# Altium PCB LED_v2.pcbdoc
Units mm, origin at the board's own origin, x right, y up, seen from the top; angles counter-clockwise.
Board outline 105.66 x 67.56 mm, 2 copper layers (Top Layer, Bottom Layer); 28 components, 90 nets, 280 pads, 65 vias.
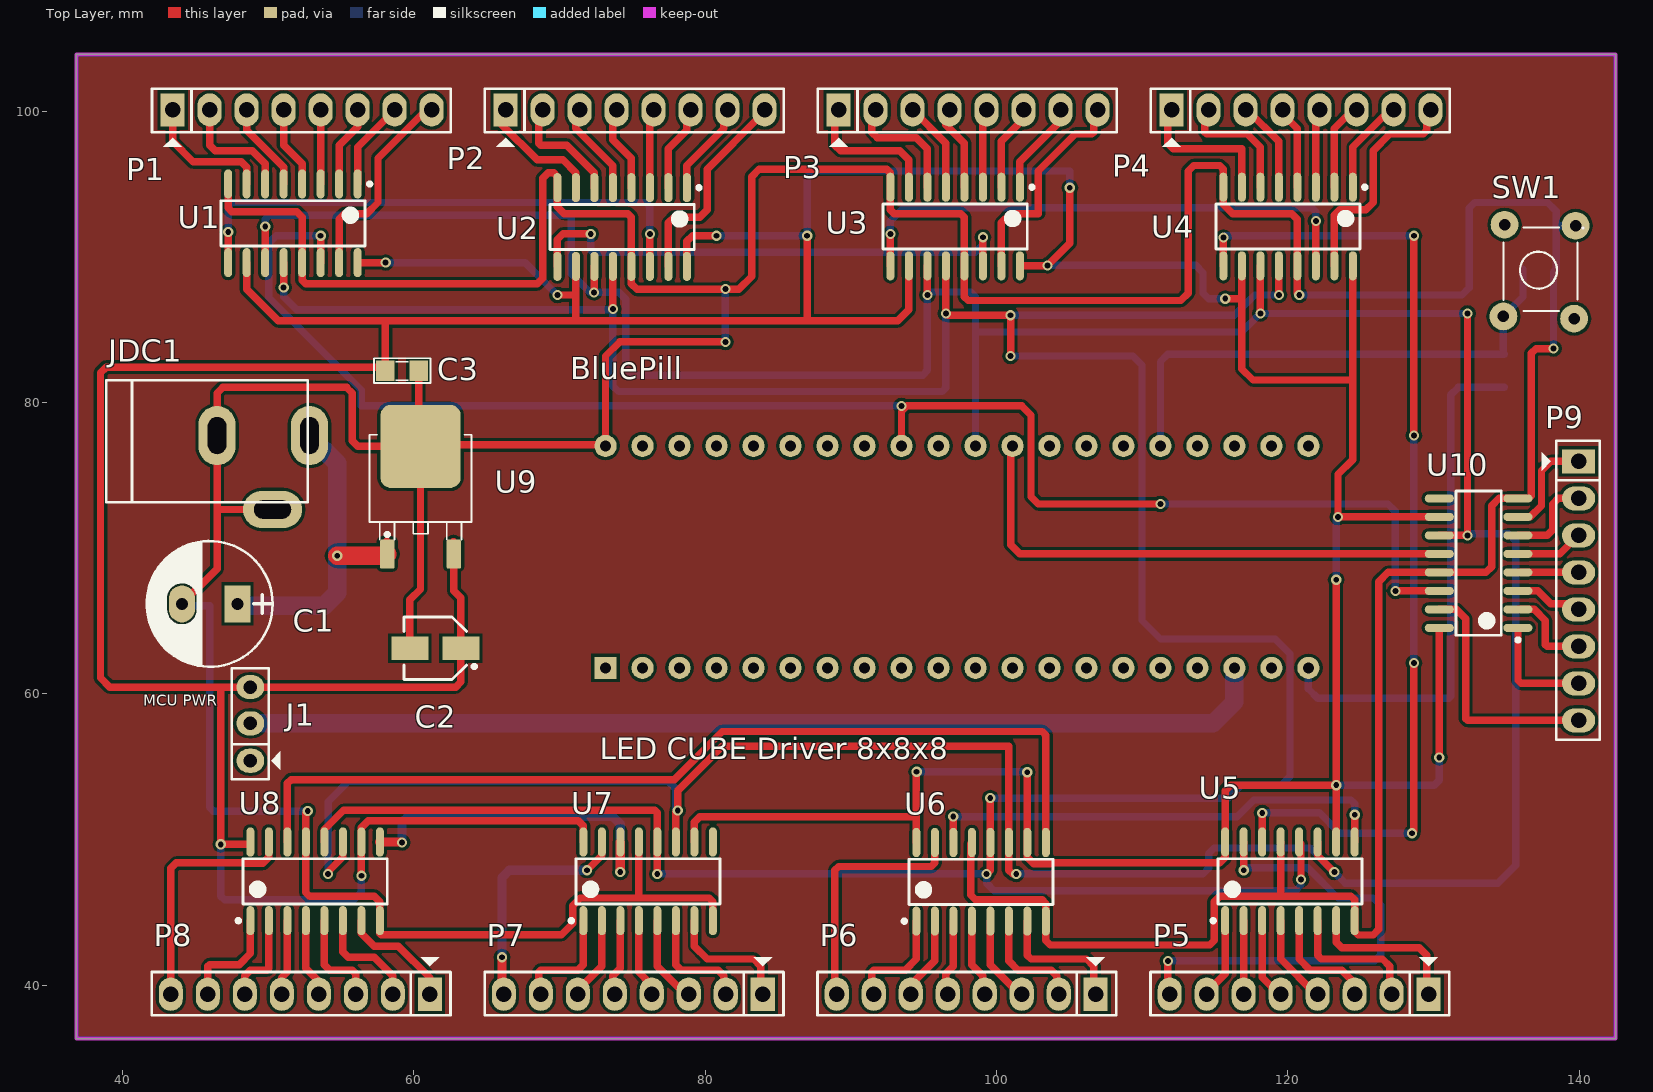
[diagram p0: Top Layer view]
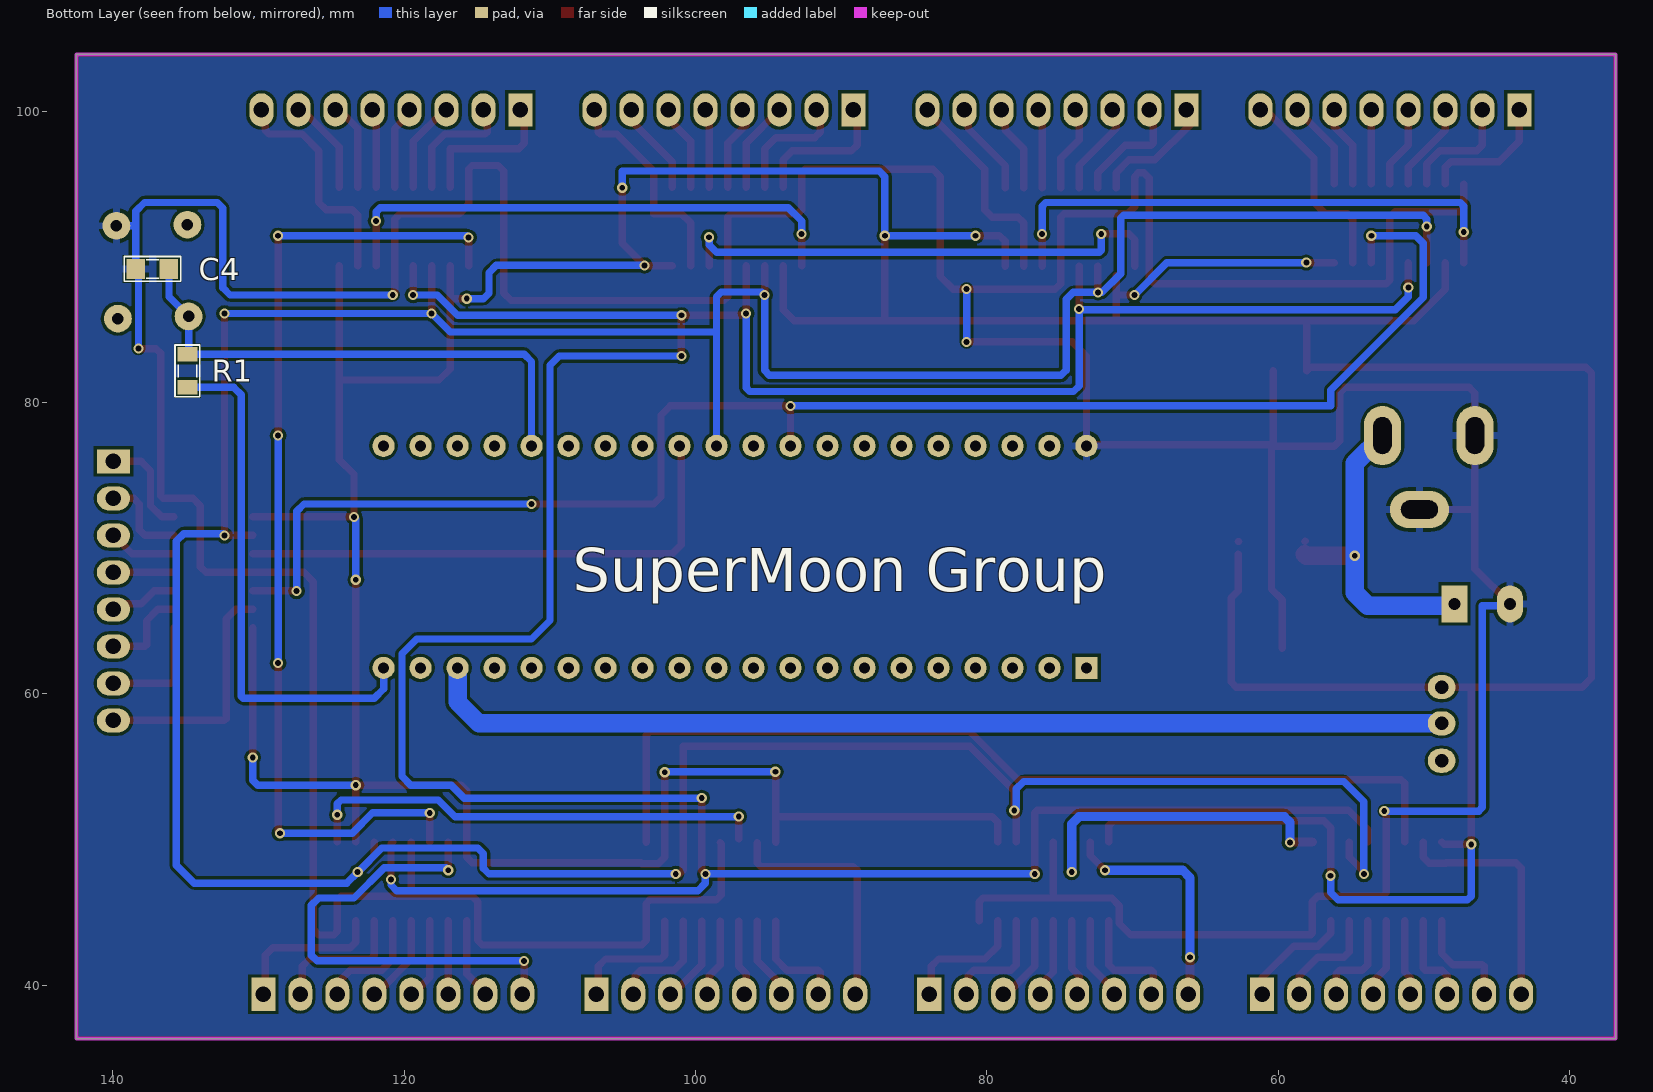
[diagram p1: Bottom Layer view, seen from below]
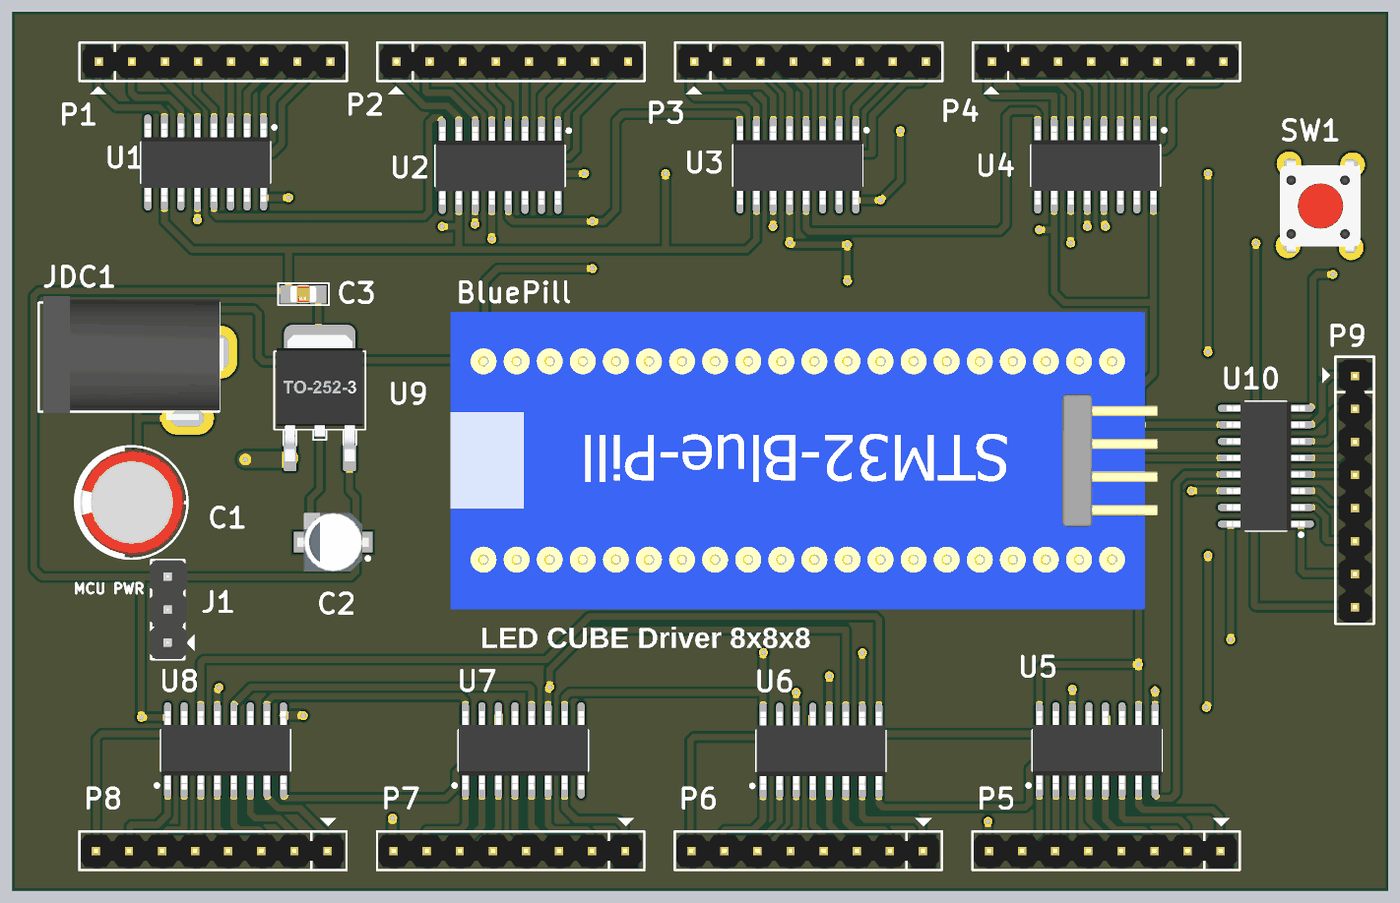
[diagram p2: 3D render of the assembled board from above, using the file's embedded part models]

## Layer stack, top to bottom
Top Solder: solder mask 0.0102, Solder Resist, Dk 3.5
Top Layer: signal copper 0.0356
Dielectric 1: dielectric 0.32, FR-4, Dk 4.8
Bottom Layer: signal copper 0.0356
Bottom Solder: solder mask 0.0102, Solder Resist, Dk 3.5

## Board outline
36.83,36.322 36.83,103.886 142.494,103.886 142.494,36.322

## Design rules (kind name [scope] priority, off if disabled: settings)
BoardOutlineClearance [All] p1: gap=0.2 ignorepadtopadclearanceinfootprint=FALSE except(0.4: Arc-SplitBarrior Arc-SplitContinuation Track-SplitBarrior Track-SplitContinuation SMDPad-SplitBarrior SMDPad-SplitContinuation THPad-SplitBarrior THPad-SplitContinuation Via-SplitBarrior Via-SplitContinuation Fill-SplitBarrior Fill-SplitContinuation Poly-SplitBarrior Poly-SplitContinuation Region-SplitBarrior Region-SplitContinuation Text-SplitBarrior Text-SplitContinuation)
Clearance "Clearance Bottom Layer" [OnLayer('Bottom Layer')] p1: gap=0.203 ignorepadtopadclearanceinfootprint=TRUE except(0.254: Arc-Text Track-Text SMDPad-Text THPad-Text Via-Text Fill-Text Poly-Text Region-Text Text-Text)
Clearance "Clearance Top Layer" [OnLayer('Top Layer')] p2: gap=0.203 ignorepadtopadclearanceinfootprint=TRUE except(0.254: Arc-Text Track-Text SMDPad-Text THPad-Text Via-Text Fill-Text Poly-Text Region-Text Text-Text)
Clearance [All] p3: gap=0.2 ignorepadtopadclearanceinfootprint=FALSE except(0.089: Arc-Arc Arc-Track Arc-SMDPad Track-Track Track-SMDPad SMDPad-SMDPad; 0.127: Arc-Via Track-Via SMDPad-Via THPad-Via Via-Via; 0.254: Arc-Text Track-Text SMDPad-Text THPad-Text Via-Text Fill-Text Poly-Text Region-Text Text-Text)
HoleSize [All] p1: absolutevalues=TRUE maxlimit=6.3 minlimit=0.2 maxpercent=80.000 minpercent=20.000
MinimumAnnularRing [All] p1: minimumring=0.076
MinimumSolderMaskSliver [All] p1: minsoldermaskwidth=0.1
PolygonConnect PolygonConnect_1 [All] p1: thpad.connectstyle=Relief thpad.reliefconductorwidth=0.508 thpad.reliefentries=4 thpad.polygonreliefangle="90 Angle" thpad.airgapwidth=0.254 smdpad.connectstyle=Relief smdpad.reliefconductorwidth=0.508 smdpad.reliefentries=4 smdpad.polygonreliefangle="90 Angle" smdpad.airgapwidth=0.254 via.connectstyle=Direct via.reliefconductorwidth=0.508 via.reliefentries=4 via.polygonreliefangle="90 Angle" via.airgapwidth=0.254
RoutingCorners [All] p1: cornerstyle=Round minsetback=2.54 maxsetback=2.54
RoutingVias [All] p1: holewidth=0.5 width=1 viastyle="Through Hole" minholewidth=0.2 minwidth=0.45 maxholewidth=1 maxwidth=2
SilkToSilkClearance [All] p1: silktosilkclearance=0.1
SilkToSolderMaskClearance [IsPad] p1: minsilkscreentomaskgap=0.1 clearancetoexposedcopper=TRUE
SolderMaskExpansion [All] p1: expansion=0.102
Width [All] p1: maxlimit=2.54 minlimit=0.089 preferedwidth=0.381
25 further rules are at their usual default settings.

## Components (designator, comment, footprint, x,y, rotation, side; value= is the part's Value field where it differs from the comment)
BluePill "BluePill" BluePill 97.282,69.393 r90 top
C1 "100uF/35V" CP1.5/3.4 47.879,66.167 r180 top value=100uF/35V/50V
C2 "Cap Pol SMD" "CAP ALU SIZE B" 61.468,63.119 r180 top value=100pF
C3 "Cap Non-Pol SMD" CAP-SM-0805 60.325,82.169 r180 top value=100pF
C4 "104" SM-0805 137.287,89.154 r0 bottom value=103
J1 "Jumper 3" JP3 48.768,57.937 r90 top value=J3
JDC1 "Jac DC" DC0 49.657,75.184 r0 top
P1 "Header 8" JP8 43.434,100.076 r0 top
P2 "Header 8" JP8 66.294,100.076 r0 top
P3 "Header 8" JP8 89.154,100.076 r0 top
P4 "Header 8" JP8 112.014,100.076 r0 top
P5 "Header 8" JP8 129.667,39.37 r180 top
P6 "Header 8" JP8 106.807,39.37 r180 top
P7 "Header 8" JP8 83.947,39.37 r180 top
P8 "Header 8" JP8 61.087,39.37 r180 top
P9 "Header 8" JP8 139.954,75.946 r270 top
R1 "Res" RES-SMD-0805 134.874,82.169 r270 bottom
SW1 "SW" SW4 134.798,85.903 r90 top value="Button chip 4 pin"
U1 "74HC595" so16 51.689,92.296 r270 top
U2 "74HC595" so16 74.295,92.042 r270 top
U3 "74HC595" so16 97.155,92.075 r270 top
U4 "74HC595" so16 120.015,92.075 r270 top
U5 "74HC595" so16 120.142,47.117 r90 top
U6 "74HC595" so16 98.933,47.084 r90 top
U7 "74HC595" so16 76.073,47.117 r90 top
U8 "74HC595" so16 53.213,47.117 r90 top
U9 "LM7805" TO252-123 60.452,73.279 r0 top
U10 "74HC595" so16 133.096,68.961 r180 top

## Footprints (in the part's own frame and the unit in brackets; to place one, negate y for a bottom-side part, rotate by r counter-clockwise, add the part's x,y. Pads: shape width x height; smd on the part's side, far side on the other; paste and mask are expansions set on the pad)
BluePill [mil] "40_PIN"
  rect 60x60 hole 30: 1(-300,950)
  round 60 hole 30: 2(-300,850) 3(-300,750) 4(-300,650) 5(-300,550) 6(-300,450) 7(-300,350) 8(-300,250) 9(-300,150) 10(-300,50) 11(-300,-50) 12(-300,-150) 13(-300,-250) 14(-300,-350) 15(-300,-450) 16(-300,-550) 17(-300,-650) 18(-300,-750) 19(-300,-850) 20(-300,-950) 21(300,-950) 22(300,-850) 23(300,-750) 24(300,-650) 25(300,-550) 26(300,-450) 27(300,-350) 28(300,-250) 29(300,-150) 30(300,-50) 31(300,50) 32(300,150) 33(300,250) 34(300,350) 35(300,450) 36(300,550) 37(300,650) 38(300,750) 39(300,850) 40(300,950)
  body extent -450,-1082 450,1055, height 250
"CAP ALU SIZE B" [mm] "Capacitor, Aluminium Electrolytric, 4.3mm L X 4.3mm W X 5.4mm H, IPC Medium Density"
  rect 2.55x1.6 smd: 1(-1.75,0) 2(1.75,0)
  silkscreen extent -2.8,-2.15 2.15,2.15, body extent -2.75,-2.25 2.75,2.25, height 5.7
CAP-SM-0805 [mil]
  rect 50x55 smd: 1(0,0) 2(90,0)
  silkscreen extent -32,-34 121,33, body extent 6,-25 84,25, height 31
CP1.5/3.4 [mil] "Tu hoa 220->470uF,16V, 470uF/16V,25V"
  rect 70x100 hole 32: 1(0,0)
  oval 70x100 hole 32: 2(150,0)
  silkscreen extent -95,-170 245,170, body extent -85,-157 230,157, height 446
DC0 [mil] "Jac DC input"
  oval 100x160 hole 50 slot 100 at 90 deg: 1(125,100) 2(-125,100)
  oval 160x100 hole 50 slot 100 at 0 deg: 3(25,-100)
  silkscreen extent -425,-80 120,250, body extent -410,-105 134,269, height 434
JP3 [mil] "Jumper 3"
  oval 65x75 hole 36: 1(-100,0) 2(1,0) 3(99,0)
  silkscreen extent -150,-81 150,50, body extent -150,-60 150,55, height 355
JP8 [mil] "JP8"
  rect 65x90 hole 42: 1(0,0)
  oval 65x90 hole 42: 2(100,0) 3(200,0) 4(300,0) 5(400,0) 6(500,0) 7(600,0) 8(700,0)
  silkscreen extent -56,-100 752,57, body extent -48,-50 748,48, height 323
RES-SMD-0805 [mil]
  rect 39.37x55 smd: 1(-45,0) 2(45,0)
  silkscreen extent -70,-34 70,33, body extent -39,-25 39,25, height 31
SM-0805 [mil] "Compoment SMD 80x50mil"
  rect 50x55 smd: 1(-45,0) 2(45,0)
  silkscreen extent -77,-34 76,33, body extent -40,-27 40,23, height 24
so16 [mm] "SOIC, 16-Leads, Body 9.90x3.91mm, Pitch 1.27mm, IPC Medium Density"
  oval 2x0.55 smd: 1(-2.7,4.445) 2(-2.7,3.175) 3(-2.7,1.905) 4(-2.7,0.635) 5(-2.7,-0.635) 6(-2.7,-1.905) 7(-2.7,-3.175) 8(-2.7,-4.445) 9(2.7,-4.445) 10(2.7,-3.175) 11(2.7,-1.905) 12(2.7,-0.635) 13(2.7,0.635) 14(2.7,1.905) 15(2.7,3.175) 16(2.7,4.445)
  silkscreen extent -2.82,-4.95 1.55,5.4, body extent -3,-4.95 3,4.95, height 1.4
SW4 [mil] "SW button 4pin, 250 x250 mil"
  round 75 hole 31: 1(0,0) 2(245,-195) 3(248,-3) 4(-6,-191)
  silkscreen extent 15,-215 240,0, body extent -36,-220 276,24, height 276
TO252-123 [mm]
  round 0.5 on Mech15: 0(0,0)
  rrect25% 1x2 smd: 1(-2.285,-3.7) 3(2.285,-3.7)
  rrect25% 5.5x5.7 smd: 2(0,3.7)
  silkscreen extent -3.5,-2.7 3.5,4.5, body extent -3.3,-3.95 3.3,5.76, height 2.31

## Part data
BluePill: library part BluePill_stm32, "stm32f103c8t6"
C1: library part CP3, "Cap 100uF/35V - 470uF/16V", Description 1="1000uF/6,3V - 470uF/16V - 330uF - 25V", Description 2="220uF/35V - 100uF/50V - 63V - 4,7uF/200V", Description 3="22uF => 33uF100V - 3,3uF => 4,7uF/250V", Description 4="2,2uF =>3,3uF/350 - 2,2uF/400V - 1uF/450V"
C2: "Polarized Capacitor (Radial)"
C3: "Capacitor"
C4: library part CM, "Cap SMD"
J1: library part JP3
JDC1: library part DCIN, "Jac DC input"
P1 P2 P3 P4 P5 P6 P7 P8 P9: "Header, 8-Pin", LatestRevisionDate=17-Jul-2002, LatestRevisionNote="Re-released for DXP Platform.", Publisher="Altium Limited"
R1: library part Res-SMD, "Resistor", Manufacturer="Generic Components", Class=Passive, Published=08/06/2000, Publisher="Altium Hobart Technology Centre"
SW1: library part SW4, "Switch button 4 pin"
U9: library part LM78xx

## Via types
v1: diameter 0.7, hole 0.4, Top Layer to Bottom Layer, 65 vias

## Nets (pads, with @x,y where several pads share a name; then routed paths per layer and width w, separated by ;. In a path a pad name is that pad's centre, name@x,y a point inside that pad or via, vN(x,y) a via of type N, cw(c..) or ccw(c..) an arc to the next point about the centre after c; other vN are vias at no path point)
CLOCK: BluePill.30 U1.11 U2.11 U3.11 U4.11 U5.11 U6.11 U7.11 U8.11 U10.11 | length 271.7
  Top Layer w0.508: U1.11 v1(49.784,92.075) ; v1(54.102,47.625) 54.102,47.773 55.118,48.789 U8.11 ; v1(72.365,87.554) 72.365,89.317 U2.11 ; U7.11 77.978,51.858 v1(78.105,51.985) 78.105,53.34 81.153,56.388 100.838,56.388 U6.11 100.838,47.879 101.092,47.625 v1(101.346,47.625) ; v1(95.25,87.376) U3.11 ; v1(118.11,86.106) U4.11 ; U5.11 122.047,48.895 v1(123.19,47.752) ; U10.11 v1(132.334,70.866) v1(132.334,86.106)
  Bottom Layer w0.508: v1(49.784,92.075) 49.784,92.583 50.038,92.837 70.612,92.837 70.802,92.647 70.802,88.837 72.085,87.554 v1(72.365,87.554) 74.066,87.554 74.549,87.071 74.549,82.22 74.905,81.864 94.92,81.864 95.25,82.194 v1(95.25,87.376) 95.453,87.579 98.222,87.579 98.552,87.249 98.552,84.836 ; v1(54.102,47.625) 54.102,52.578 55.499,53.975 77.47,53.975 77.978,53.467 77.978,52.112 v1(78.105,51.985) ; BluePill.30@98.552,77.089 98.552,84.836 ; v1(101.346,47.625) 114.173,47.625 114.554,48.006 114.554,49.022 114.935,49.403 121.539,49.403 v1(123.19,47.752) 123.952,46.99 134.417,46.99 135.636,48.209 135.636,70.485 135.128,70.993 132.461,70.993 v1(132.334,70.866) ; v1(132.334,86.106) v1(118.11,86.106) 116.84,84.836 98.552,84.836
DATA_LATCH: BluePill.31
DATE_LATCH: U1.12 U2.12 U3.12 U4.12 U5.12 U6.12 U7.12 U8.12 | length 243.1
  Top Layer w0.508: v1(51.054,87.884) U1.12 ; U8.12 53.848,50.673 55.16,51.985 76.539,51.985 76.708,51.816 U7.12 v1(76.708,47.625) ; U2.12 v1@73.66,86.487 ; U3.12 v1(96.52,86.106) 96.647,85.979 v1(100.965,85.979) v1(100.965,83.185) ; v1(99.314,47.625) 99.568,47.879 U6.12 v1(99.568,52.832) ; v1(119.38,87.376) U4.12 ; U5.12 120.904,49.69 v1(120.904,47.244) ; v1@73.66,86.487 73.584,86.487 v1(73.66,86.411) v1@73.66,86.487
  Bottom Layer w0.508: v1(51.054,87.884) 51.054,87.249 51.943,86.36 v1@73.66,86.36 ; v1(73.66,86.411) v1@73.66,86.36 ; v1(76.708,47.625) v1(99.314,47.625) 99.314,46.99 99.822,46.482 120.523,46.482 120.904,46.863 v1(120.904,47.244) ; v1(96.52,86.106) 96.52,81.001 96.266,80.747 74.041,80.747 73.66,81.128 v1@73.66,86.36 ; v1(99.568,52.832) 115.869,52.832 116.758,53.721 119.54,53.721 120.142,54.323 120.142,62.738 119.126,63.754 111.252,63.754 109.982,65.024 109.982,82.55 109.347,83.185 v1(100.965,83.185) ; v1(100.965,85.979) 116.332,85.979 117.729,87.376 v1(119.38,87.376)
GND: BluePill.40 C1.2 C2.2 C3.1 C4.2 JDC1.2 JDC1.3 SW1.2 U1.8 U1.13 U2.8 U2.13 U3.8 U3.13 U4.8 U4.13 U5.8 U5.13 U6.8 U6.13 U7.8 U7.13 U8.8 U8.13 U9.2 U10.8 U10.13 | length 409.1
  Top Layer w0.508: C1.2 46.482,68.58 46.482,72.644 ; U1.8 47.244,93.345 47.498,93.091 51.943,93.091 52.324,92.71 U1.13 52.324,88.392 52.578,88.138 68.453,88.138 68.834,88.519 68.834,95.377 69.215,95.758 69.596,95.758 69.85,95.504 U2.8 69.85,93.421 70.307,92.964 74.676,92.964 74.93,92.71 U2.13 74.93,88.138 75.311,87.757 82.296,87.757 83.185,88.646 83.185,95.504 83.693,96.012 92.456,96.012 92.71,95.758 U3.8 92.71,93.218 92.964,92.964 97.536,92.964 97.79,92.71 U3.13 97.79,87.249 98.044,86.995 112.649,86.995 113.157,87.503 113.157,95.885 113.538,96.266 115.316,96.266 115.57,96.012 U4.8 115.57,93.599 116.205,92.964 120.269,92.964 120.65,92.583 U4.13 120.65,87.503 v1(120.777,87.376) ; JDC1.3 46.482,72.644 ; v1(52.705,51.943) 52.578,51.816 U8.13 52.578,46.355 52.832,46.101 57.277,46.101 57.658,45.72 U8.8 57.658,43.561 57.76,43.459 70.129,43.459 70.896,44.226 70.896,45.445 71.425,45.974 75.311,45.974 ; C2.2 59.718,66.449 60.452,67.183 U9.2 ; C3.1 60.325,77.106 U9.2 ; U7.13 75.438,45.974 80.264,45.974 80.518,45.72 U7.8 ; v1(81.382,84.15) 74.117,84.15 73.152,83.185 73.152,77.089 60.562,77.089 U9.2 ; U6.13 98.222,49.708 98.222,46.177 98.552,45.847 103.124,45.847 103.378,45.593 U6.8 103.378,43.053 103.683,42.748 114.63,42.748 114.935,43.053 114.935,45.72 115.316,46.101 119.38,46.101 ; U5.13 119.507,46.228 119.38,46.101 ; v1(138.239,83.693) 137.033,83.693 136.703,83.363 136.703,73.584 136.525,73.406 U10.8 134.493,73.406 133.985,72.898 133.985,68.707 133.604,68.326 U10.13 126.873,68.326 126.238,67.691 126.238,43.815 125.857,43.434 124.841,43.434 124.587,43.688 U5.8 124.587,45.847 124.333,46.101 119.38,46.101 ; 46.482,72.644 JDC1.2 46.482,80.645 46.863,81.026 55.372,81.026 55.753,80.645 55.753,77.36 56.134,76.979 U9.2
  Bottom Layer w0.508: C1.2 44.196,66.04 45.974,66.04 45.974,52.197 46.228,51.943 v1(52.705,51.943) ; v1(81.382,84.15) v1(81.382,87.782) ; v1(120.777,87.376) 131.953,87.376 132.461,87.884 132.461,93.345 132.842,93.726 137.82,93.726 138.43,93.116 138.43,92.177 ; v1(138.239,83.693) 138.239,88.963 C4.2 138.43,92.177 ; SW1.2 138.481,92.126 138.43,92.177
LAYER_LATCH: BluePill.29 U10.12 | length 36.6
  Top Layer w0.508: BluePill.29@101.092,77.089 100.965,76.962 100.965,70.231 101.6,69.596 U10.12
MOSI: BluePill.32 U1.14 U10.14 | length 107.6
  Top Layer w0.508: U1.14 v1(53.594,91.44) ; BluePill.32@93.472,77.089 93.472,79.375 93.853,79.756 101.727,79.756 102.362,79.121 102.362,73.533 102.87,73.025 v1(111.252,73.025) ; v1(127.381,67.056) U10.14
  Bottom Layer w0.508: v1(53.594,91.44) 50.546,91.44 50.038,90.932 50.038,87.198 56.388,80.848 56.388,79.756 v1(93.472,79.756) ; v1(111.252,73.025) 126.873,73.025 127.381,72.517 v1(127.381,67.056)
NetBluePill_18: BluePill.18 J1.2 | length 70.6
  Bottom Layer w1.27: J1.2 114.859,57.963 116.332,59.436 BluePill.18@116.332,61.849
NetBluePill_20: BluePill.20 R1.2 | length 36.2
  Bottom Layer w0.508: BluePill.20@121.412,61.849 121.412,60.325 122.047,59.69 131.064,59.69 131.191,59.817 131.191,80.518 131.699,81.026 R1.2
NetBluePill_25: BluePill.25 C4.1 R1.1 SW1.1 | length 36
  Bottom Layer w0.508: BluePill.25@111.252,77.089 111.252,82.804 111.76,83.312 R1.1 134.798,83.388 SW1.1 136.144,87.249 C4.1
NetC1_1: C1.1 JDC1.1 U9.1 | length 22.4
  Top Layer w0.508: U9.1@58.133,70.485 U9.1@58.167,70.451
  Top Layer w1.27: v1(54.737,69.469) 58.057,69.469 U9.1
  Bottom Layer w1.27: C1.1 48.006,66.04 53.848,66.04 54.737,66.929 v1(54.737,69.469) 54.737,75.819 JDC1.1
NetP1_1: P1.1 U1.7 | length 9.8
  Top Layer w0.508: P1.1 43.434,97.917 44.831,96.52 48.133,96.52 48.514,96.139 U1.7
  Bottom Layer w0.508: P1.1@43.434,99.441 P1.1
NetP1_2: P1.2 U1.6 | length 8.1
  Top Layer w0.508: P1.2 45.974,97.663 46.355,97.282 48.895,97.282 49.784,96.393 U1.6
NetP1_3: P1.3 U1.5 | length 6.1
  Top Layer w0.508: P1.3 48.514,98.679 51.054,96.139 U1.5
NetP1_4: P1.4 U1.4 | length 5.6
  Top Layer w0.508: P1.4 51.054,97.663 52.324,96.393 U1.4
NetP1_5: P1.5 U1.3 | length 5.1
  Top Layer w0.508: U1.3 P1.5
NetP1_6: P1.6 U1.2 | length 5.6
  Top Layer w0.508: U1.2 54.864,97.663 56.134,98.933 P1.6
NetP1_7: P1.7 U1.1 | length 6.1
  Top Layer w0.508: U1.1 56.134,97.536 P1.7
NetP1_8: P1.8 U1.15 | length 14.2
  Top Layer w0.508: U1.15 54.864,92.583 55.245,92.964 56.769,92.964 57.531,93.726 57.531,96.774 60.833,100.076 P1.8
NetP2_1: P2.1 U2.7 | length 8.5
  Top Layer w0.508: P2.1@66.04,100.076 66.04,99.06 68.453,96.647 70.231,96.647 71.12,95.758 U2.7
NetP2_2: P2.2 U2.6 | length 8
  Top Layer w0.508: P2.2@68.58,100.076 68.58,97.79 68.707,97.663 70.485,97.663 72.39,95.758 U2.6
NetP2_3: P2.3 U2.5 | length 6.4
  Top Layer w0.508: P2.3@71.12,100.076 71.12,98.806 73.66,96.266 U2.5
NetP2_4: P2.4 U2.4 | length 5.9
  Top Layer w0.508: P2.4@73.66,100.076 73.66,98.044 74.93,96.774 U2.4
NetP2_5: P2.5 U2.3 | length 5.3
  Top Layer w0.508: U2.3 P2.5@76.2,100.076
NetP2_6: P2.6 U2.2 | length 5.9
  Top Layer w0.508: U2.2 77.47,97.409 78.74,98.679 P2.6@78.74,100.076
NetP2_7: P2.7 U2.1 | length 6.4
  Top Layer w0.508: U2.1 78.74,96.266 81.28,98.806 P2.7@81.28,100.076
NetP2_8: P2.8 U2.15 | length 14.4
  Top Layer w0.508: U2.15 77.47,92.329 77.851,92.71 79.629,92.71 80.137,93.218 80.137,96.012 83.82,99.695 P2.8@83.82,100.076
NetP3_1: P3.1 U3.7 | length 9.8
  Top Layer w0.508: P3.1@88.9,100.076 88.9,97.663 89.281,97.282 93.345,97.282 93.98,96.647 U3.7
NetP3_2: P3.2 U3.6 | length 8.4
  Top Layer w0.508: P3.2@91.44,100.076 91.44,98.552 91.821,98.171 94.488,98.171 95.25,97.409 U3.6
NetP3_3: P3.3 U3.5 | length 6.5
  Top Layer w0.508: P3.3@93.98,100.076 P3.3 96.52,97.79 U3.5
NetP3_4: P3.4 U3.4 | length 5.8
  Top Layer w0.508: P3.4@96.52,100.076 96.52,99.06 97.79,97.79 U3.4
NetP3_5: P3.5 U3.3 | length 5.3
  Top Layer w0.508: U3.3 P3.5@99.06,100.076
NetP3_6: P3.6 U3.2 | length 5.8
  Top Layer w0.508: U3.2 100.33,97.917 101.6,99.187 P3.6@101.6,100.076
NetP3_7: P3.7 U3.1 | length 6.4
  Top Layer w0.508: U3.1 101.6,96.52 104.14,99.06 P3.7@104.14,100.076
NetP3_8: P3.8 U3.15 | length 15.1
  Top Layer w0.508: U3.15 100.33,92.329 100.965,92.964 102.87,92.964 102.87,95.885 105.41,98.425 106.553,98.425 106.68,98.552 P3.8@106.68,100.076
NetP4_1: P4.1 U4.7 | length 10.2
  Top Layer w0.508: P4.1@111.76,100.076 111.76,97.79 112.141,97.409 116.84,97.409 U4.7
NetP4_2: P4.2 U4.6 | length 8.5
  Top Layer w0.508: P4.2@114.3,100.076 114.3,98.552 114.427,98.425 117.221,98.425 118.11,97.536 U4.6
NetP4_3: P4.3 U4.5 | length 6.6
  Top Layer w0.508: P4.3@116.84,100.076 P4.3 117.221,100.076 119.38,97.917 U4.5
NetP4_4: P4.4 U4.4 | length 5.8
  Top Layer w0.508: P4.4@119.38,100.076 120.65,98.806 U4.4
NetP4_5: P4.5 U4.3 | length 5.3
  Top Layer w0.508: U4.3 P4.5@121.92,100.076
NetP4_6: P4.6 U4.2 | length 5.8
  Top Layer w0.508: U4.2 123.19,98.806 P4.6@124.46,100.076
NetP4_7: P4.7 U4.1 | length 6.4
  Top Layer w0.508: U4.1 124.46,97.536 P4.7@127,100.076
NetP4_8: P4.8 U4.15 | length 15.7
  Top Layer w0.508: U4.15 123.19,92.837 123.571,93.218 125.349,93.218 125.857,93.726 125.857,97.282 127,98.425 129.286,98.425 129.54,98.679 P4.8@129.54,100.076
NetP5_1: P5.1 U5.7 | length 10.7
  Top Layer w0.508: U5.7 123.317,42.926 123.698,42.545 129.032,42.545 129.54,42.037 P5.1@129.54,39.37
NetP5_2: P5.2 U5.6 | length 9.6
  Top Layer w0.508: U5.6 122.047,42.037 122.301,41.783 126.492,41.783 127,41.275 P5.2@127,39.37
NetP5_3: P5.3 U5.5 | length 7.8
  Top Layer w0.508: U5.5 120.777,41.783 121.539,41.021 123.698,41.021 124.46,40.259 P5.3@124.46,39.37
NetP5_4: P5.4 U5.4 | length 6
  Top Layer w0.508: U5.4 119.507,41.783 P5.4@121.92,39.37
NetP5_5: P5.5 U5.3 | length 5.5
  Top Layer w0.508: U5.3 118.237,40.513 P5.5@119.38,39.37
NetP5_6: P5.6 U5.2 | length 5.1
  Top Layer w0.508: P5.6@116.84,39.37 116.967,39.497 U5.2
NetP5_7: P5.7 U5.1 | length 5.6
  Top Layer w0.508: P5.7@114.3,39.37 115.697,40.767 U5.1
NetP5_8: P5.8 U5.15 | length 33
  Top Layer w0.508: P5.8@111.76,39.37 v1(111.76,41.656) ; v1(116.967,47.879) U5.15
  Bottom Layer w0.508: v1(111.76,41.656) 125.984,41.656 126.365,42.037 126.365,45.466 125.857,45.974 123.444,45.974 121.367,48.051 117.139,48.051 v1(116.967,47.879)
NetP6_1: P6.1 U6.7 | length 9.1
  Top Layer w0.508: U6.7 102.108,42.037 102.362,41.783 106.172,41.783 106.68,41.275 P6.1@106.68,39.37
NetP6_2: P6.2 U6.6 | length 7.7
  Top Layer w0.508: U6.6 100.838,41.656 101.473,41.021 103.759,41.021 104.14,40.64 P6.2@104.14,39.37
NetP6_3: P6.3 U6.5 | length 5.9
  Top Layer w0.508: U6.5 99.568,41.402 P6.3@101.6,39.37
NetP6_4: P6.4 U6.4 | length 5.3
  Top Layer w0.508: U6.4 98.298,41.402 99.06,40.64 P6.4@99.06,39.37
NetP6_5: P6.5 U6.3 | length 5.2
  Top Layer w0.508: P6.5@96.52,39.37 96.52,40.767 97.028,41.275 U6.3
NetP6_6: P6.6 U6.2 | length 5.8
  Top Layer w0.508: P6.6@93.98,39.37 93.98,39.878 95.758,41.656 U6.2
NetP6_7: P6.7 U6.1 | length 7.5
  Top Layer w0.508: P6.7@91.44,39.37 91.44,40.894 91.567,41.021 93.726,41.021 94.488,41.783 U6.1
NetP6_8: P6.8 U6.15 | length 17
  Top Layer w0.508: P6.8@88.9,39.37 88.9,47.879 89.154,48.133 95.504,48.133 95.758,48.387 U6.15
NetP7_1: P7.1 U7.7 | length 8.8
  Top Layer w0.508: U7.7 79.248,42.672 80.137,41.783 83.312,41.783 83.82,41.275 P7.1@83.82,39.37
NetP7_2: P7.2 U7.6 | length 7.9
  Top Layer w0.508: U7.6 77.978,41.402 78.359,41.021 80.899,41.021 81.28,40.64 P7.2@81.28,39.37
NetP7_3: P7.3 U7.5 | length 6
  Top Layer w0.508: U7.5 76.708,41.275 78.613,39.37 P7.3@78.74,39.37
NetP7_4: P7.4 U7.4 | length 5.4
  Top Layer w0.508: U7.4 75.438,40.894 76.2,40.132 P7.4@76.2,39.37
NetP7_5: P7.5 U7.3 | length 5.3
  Top Layer w0.508: P7.5@73.66,39.37 73.66,40.64 74.168,41.148 U7.3
NetP7_6: P7.6 U7.2 | length 5.8
  Top Layer w0.508: P7.6@71.12,39.37 71.12,39.497 72.898,41.275 U7.2
NetP7_7: P7.7 U7.1 | length 7.8
  Top Layer w0.508: P7.7@68.58,39.37 68.58,40.894 68.707,41.021 71.247,41.021 71.628,41.402 U7.1
NetP7_8: P7.8 U7.15 | length 16.4
  Top Layer w0.508: v1(71.882,47.879) 72.898,48.895 U7.15
  Top Layer w0.635: P7.8@66.04,39.37 v1(66.04,41.91)
  Bottom Layer w0.635: v1(66.04,41.91) 66.04,47.371 66.548,47.879 v1(71.882,47.879)
NetP8_1: P8.1 U8.7 | length 8
  Top Layer w0.508: U8.7 56.388,43.561 57.277,42.672 58.928,42.672 61.087,40.513 P8.1
NetP8_2: P8.2 U8.6 | length 7.5
  Top Layer w0.508: U8.6 55.118,42.291 55.499,41.91 57.277,41.91 58.547,40.64 P8.2
NetP8_3: P8.3 U8.5 | length 6.8
  Top Layer w0.508: U8.5 53.848,41.402 54.229,41.021 55.753,41.021 56.007,40.767 P8.3
NetP8_4: P8.4 U8.4 | length 5.4
  Top Layer w0.508: U8.4 52.578,41.148 53.467,40.259 P8.4
NetP8_5: P8.5 U8.3 | length 5.2
  Top Layer w0.508: P8.5 50.927,40.513 51.308,40.894 U8.3
NetP8_6: P8.6 U8.2 | length 6.4
  Top Layer w0.508: P8.6 48.387,40.64 48.768,41.021 49.911,41.021 50.038,41.148 U8.2
NetP8_7: P8.7 U8.1 | length 7.4
  Top Layer w0.508: P8.7 45.847,41.275 45.974,41.402 48.006,41.402 48.768,42.164 U8.1
NetP8_8: P8.8 U8.15 | length 16.8
  Top Layer w0.508: P8.8 43.307,48.006 43.688,48.387 48.438,48.387 48.465,48.36 49.63,48.36 50.038,48.768 U8.15
NetP9_1: P9.1 U10.7 | length 7.1
  Top Layer w0.508: U10.7 136.652,72.136 137.414,72.898 137.414,75.311 138.049,75.946 P9.1
NetP9_2: P9.2 U10.6 | length 6.3
  Top Layer w0.508: U10.6 137.795,70.866 138.176,71.247 138.176,73.025 138.557,73.406 P9.2
NetP9_3: P9.3 U10.5 | length 4.7
  Top Layer w0.508: U10.5 138.684,69.596 P9.3
NetP9_4: P9.4 U10.4 | length 4.2
  Top Layer w0.508: U10.4 P9.4
NetP9_5: P9.5 U10.3 | length 4.7
  Top Layer w0.508: U10.3 137.16,67.056 138.049,66.167 139.573,66.167 P9.5
NetP9_6: P9.6 U10.2 | length 6.2
  Top Layer w0.508: U10.2 136.906,65.786 137.668,65.024 137.668,63.373 137.795,63.246 P9.6
NetP9_7: P9.7 U10.1 | length 7.8
  Top Layer w0.508: U10.1 135.796,60.927 136.017,60.706 P9.7
NetP9_8: P9.8 U10.15 | length 16.7
  Top Layer w0.508: U10.15 131.572,65.786 132.207,65.151 132.207,58.293 132.334,58.166 P9.8
NetU1_9: U1.9 U2.14 | length 37.2
  Top Layer w0.508: U1.9 v1(47.244,91.694) ; U2.14 v1(76.2,91.567)
  Bottom Layer w0.508: v1(47.244,91.694) 47.244,93.472 47.498,93.726 75.946,93.726 76.2,93.472 v1(76.2,91.567)
NetU2_9: U2.9 U3.14 | length 35.1
  Top Layer w0.508: U2.9 69.85,91.186 70.231,91.567 v1(72.136,91.567) ; U3.14 v1(99.06,91.338)
  Bottom Layer w0.508: v1(72.136,91.567) 72.136,90.44 72.279,90.297 98.552,90.297 99.06,90.805 v1(99.06,91.338)
NetU3_9: U3.9 U4.14 | length 36.5
  Top Layer w0.508: U3.9 v1(92.71,91.567) ; U4.14 v1(121.92,92.456)
  Bottom Layer w0.508: v1(92.71,91.567) 92.71,92.456 93.624,93.37 121.641,93.37 121.92,93.091 v1(121.92,92.456)
NetU4_9: U4.9 U5.14 | length 68.8
  Top Layer w0.508: U4.9 v1(115.57,91.313) ; U5.14 v1(118.237,51.816) ; v1(128.524,50.419) 128.651,50.546 v1(128.651,62.103) ; v1(128.651,77.724) v1(128.651,91.44)
  Bottom Layer w0.508: v1(115.57,91.313) 115.697,91.44 v1(128.651,91.44) ; v1(118.237,51.816) 122.174,51.816 123.571,50.419 v1(128.524,50.419) ; v1@128.651,62.357 v1(128.651,77.724)
NetU5_9: U5.9 U6.14 | length 32.3
  Top Layer w0.508: U6.14@97.028,50.038 v1(97.028,51.562) ; U5.9 v1(124.587,51.689)
  Bottom Layer w0.508: v1(97.028,51.562) 116.504,51.562 117.647,52.705 124.333,52.705 124.587,52.451 v1(124.587,51.689)
NetU6_9: U6.9 U8.14 | length 65
  Top Layer w0.508: U8.14 51.308,53.848 51.562,54.102 77.861,54.102 81.163,57.404 103.124,57.404 103.378,57.15 U6.9
NetU7_14: U7.14 U8.9 | length 23.7
  Top Layer w0.635: U8.9 59.149,49.817 v1(59.182,49.784) ; v1(74.168,47.752) U7.14
  Bottom Layer w0.635: v1(59.182,49.784) 59.182,51.181 59.563,51.562 73.66,51.562 74.168,51.054 v1(74.168,47.752)
VCC: C2.1 C3.2 J1.3 U1.10 U1.16 U2.10 U2.16 U3.10 U3.16 U4.10 U4.16 U5.10 U5.16 U6.10 U6.16 U7.10 U7.16 U8.10 U8.16 U9.3 U10.10 U10.16 | length 399.9
  Top Layer w0.508: U1.10 48.514,87.757 50.673,85.598 57.963,85.598 ; U8.16 48.608,49.657 v1(46.736,49.657) 46.736,60.325 46.609,60.452 ; U1.16 v1(58.057,89.596) ; v1(56.388,47.498) U8.10 56.388,50.8 56.862,51.274 71.281,51.274 71.628,50.927 U7.16 ; U9.3@62.704,70.451 U9.3@62.737,70.451 ; U9.3 62.737,67.057 63.218,66.576 C2.1 63.218,60.805 62.865,60.452 J1.3 46.609,60.452 ; v1(69.85,87.376) 71.12,87.376 ; U2.10@71.12,88.707 71.12,87.376 ; U2.16 78.74,91.059 79.121,91.44 v1(80.772,91.44) ; U7.10 79.248,51.181 79.629,51.562 94.488,51.562 ; v1(86.995,91.44) 86.995,85.598 ; U3.10 93.98,86.36 93.218,85.598 86.995,85.598 ; U6.16 94.488,51.562 ; v1(94.513,54.635) 94.488,54.61 94.488,51.562 ; U3.16 103.472,89.375 v1(103.505,89.408) 105.029,90.932 v1(105.029,94.742) ; v1(102.108,54.61) U6.10 102.108,48.768 102.549,48.327 103.681,48.327 103.741,48.387 115.316,48.387 115.697,48.768 U5.16 115.697,53.34 116.078,53.721 v1(123.317,53.721) ; v1(115.697,87.122) 116.84,87.122 ; U4.10 116.84,87.122 ; U5.10 v1(123.317,53.721) ; v1(123.317,67.818) v1(123.317,53.721) ; U4.16 124.46,81.534 ; v1(130.396,55.626) U10.16 ; U10.10 v1(123.444,72.136) 123.444,75.057 124.46,76.073 124.46,81.534 ; 46.609,60.452 39.116,60.452 38.481,61.087 38.481,82.042 38.862,82.423 57.785,82.423 C3.2 58.039,85.522 57.963,85.598 ; 57.963,85.598 71.12,85.598 ; 71.12,85.598 86.995,85.598 ; 71.12,85.598 71.12,87.376 ; 116.84,87.122 116.84,82.296 117.602,81.534 124.46,81.534
  Bottom Layer w0.508: v1(46.736,49.657) 46.736,46.101 46.99,45.847 55.88,45.847 56.388,46.355 v1(56.388,47.498) ; v1(58.057,89.596) 67.63,89.596 v1(69.85,87.376) ; v1(80.772,91.44) v1(86.995,91.44) 86.995,95.504 87.376,95.885 105.029,95.885 v1(105.029,94.742) ; v1(94.513,54.635) 102.083,54.635 v1(102.108,54.61) ; v1(103.505,89.408) 113.665,89.408 114.173,88.9 114.173,87.503 114.554,87.122 v1(115.697,87.122) ; v1(123.317,53.721) 130.048,53.721 130.396,54.069 v1(130.396,55.626) ; v1(123.317,67.818) 123.317,72.009 v1(123.444,72.136)
pads on no net: BluePill.1 BluePill.2 BluePill.3 BluePill.4 BluePill.5 BluePill.6 BluePill.7 BluePill.8 BluePill.9 BluePill.10 BluePill.11 BluePill.12 BluePill.13 BluePill.14 BluePill.15 BluePill.16 BluePill.17 BluePill.19 BluePill.21 BluePill.22 BluePill.23 BluePill.24 BluePill.26 BluePill.27 BluePill.28 BluePill.33 BluePill.34 BluePill.35 BluePill.36 BluePill.37 BluePill.38 BluePill.39 J1.1 SW1.3 SW1.4 U7.9 U9.0 U10.9

## Polygon pours and split planes (outlines as drawn)
GND on Bottom Layer "Bottom Layer-GND" (solid, pour order 13): 36.83,103.886 142.494,103.886 142.494,36.322 36.83,36.322
no net on Top Layer "Top Layer-No Net" (solid, pour order 15): 36.83,103.886 142.494,103.886 142.494,36.322 36.83,36.322

## Keep-outs
Keep-Out Layer:
  the board outline again, w0.254

## Other copper
Top Layer:
  region net GND: 97.79,89.375

## Silkscreen, mask and mechanical layers (free items; w line width, h text height)
Top Overlay:
  text "MCU PWR" at 41.402,59.182 h0.76
  text "LED CUBE Driver 8x8x8" at 72.771,54.991 h2.54
Bottom Overlay:
  text "SuperMoon Group" at 108.407,66.04 h5.08
Top Paste:
  lines w0.254: 36.957,32.004 36.957,32.512 ; 38.48,32.769 36.957,32.258 ; 38.482,31.753 36.957,32.258 ; 81.079,32.332 36.957,32.258 ; 98.397,32.361 142.519,32.436 ; 140.995,32.941 142.519,32.436 ; 140.996,31.925 142.519,32.436 ; 142.52,32.182 142.519,32.69
  text "105.563 (mm)" at 81.335,31.419 h1.52 r0.1